# EAGLE board SolarBase731-v00 (EAGLE 5.10)
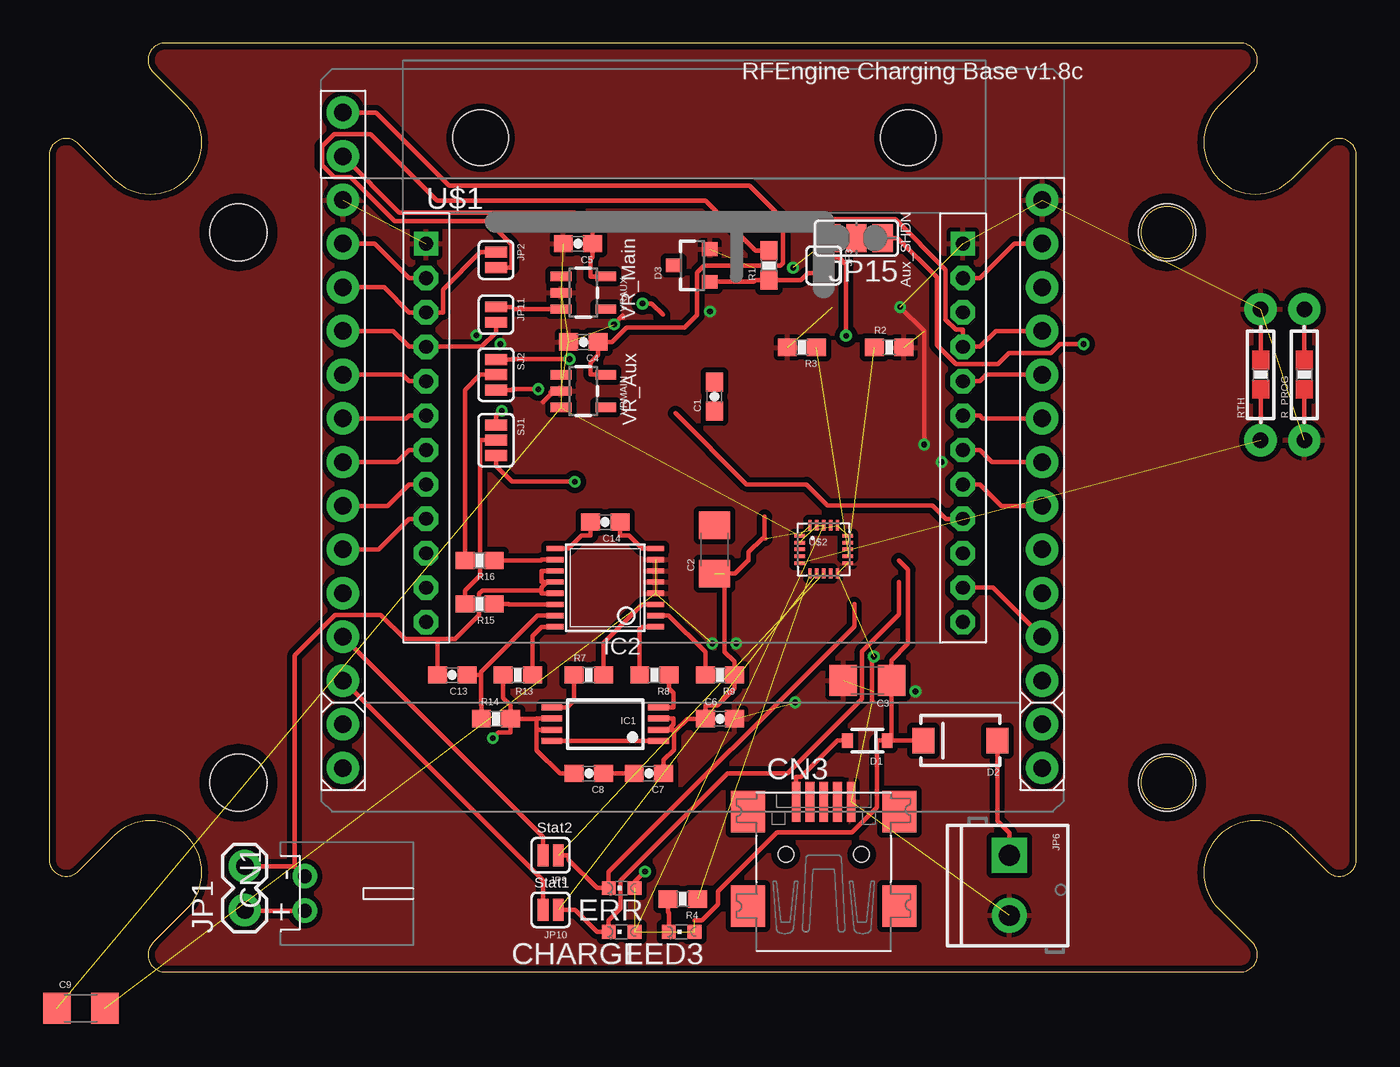
[diagram p0: board, top side]
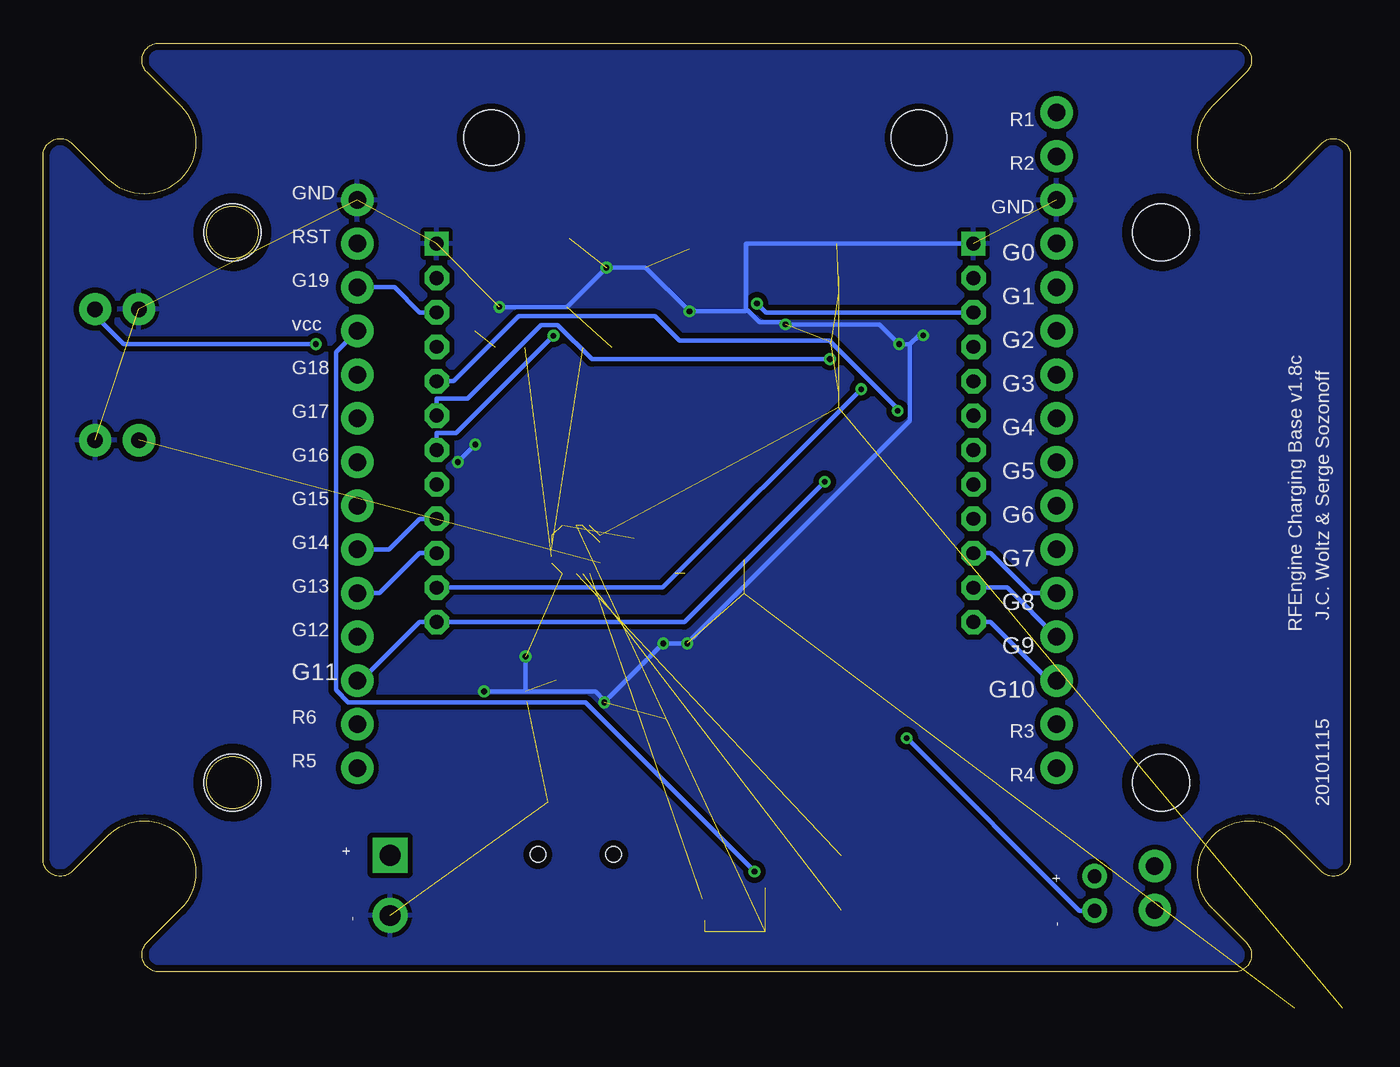
[diagram p1: board, bottom side, seen from below]

Size 76 x 54 mm. Coordinates in mm from the lower left corner, seen from the top.
Outline: 72.24,46.1 arc-180 68,50.34 69.95,52.29 arc135 69.24,54 6.75,54 arc135 6.05,52.29 8,50.34 arc-180 3.76,46.1 1.71,48.15 arc135 0,47.44 0,6.55 arc135 1.71,5.85 3.76,7.9 arc-180 8,3.66 6.05,1.71 arc135 6.75,0 69.24,0 arc135 69.95,1.71 68,3.66 arc-180 72.24,7.9 74.29,5.85 arc135 76,6.55 76,47.44 arc135 74.29,48.15 72.24,46.1
Outline: circle at 64.99,43 radius 1.5
Outline: circle at 64.99,11 radius 1.5
Copper layers (1*16): Top 0.0356mm / dielectric 1.5011mm / Bottom 0.0356mm
Design rules "LaenPCBOrder-JCModified *": minimum track width 10mil, minimum drill 13mil, track to track 10mil, track to pad 6mil, pad to pad 6mil, via to via 6mil, smd to smd 6mil, copper to edge 15mil, drill to drill 6mil, minimum pad ring 12mil, minimum via ring 7mil, stop-mask expansion 4mil, vias tented up to drill 25mil, thermal gap 10mil

## Footprints (pad centres in the part's own frame; a part is rotated, then mirrored left to right if it is on the bottom)
0603-CAP = smd 1.1 x 1: 1 -0.85,0; 2 0.85,0
1206 = smd 1.6 x 1.8: 1 -1.4,0; 2 1.4,0
CHIPLED_0603 = smd 0.8 x 0.8: A 0,-0.75; C 0,0.75
JST-PH-2-THM-RA = drill 0.8 pad 1.422 round: 1 1,0; 2 -1,0
USB-MINIB = smd 0.5 x 2.308: D+ 0,4.064; D- -0.8,4.064; GND 1.6,4.064; ID 0.8,4.064; VBUS -1.6,4.064 | smd 2 x 2.4: GND1 -4.4,-2; GND2 -4.4,3.5; GND3 4.4,3.5; GND4 4.4,-2 | hole 0.9: -2.2,1; 2.2,1
SOD-323 = smd 0.63 x 0.83: 1 -1.15,0; 2 1.15,0
SMA-DIODE = smd 1.27 x 1.47: A -2.15,0; C 2.15,0
SOT23-3 = smd 0.8 x 0.9: 1 -0.95,-1; 2 0.95,-1; 3 0,1.1
TSSOP8-4.4MM = smd 1.2 x 0.35: 1 -3.1,0.975; 2 -3.1,0.325; 3 -3.1,-0.325; 4 -3.1,-0.975; 5 3.1,-0.975; 6 3.1,-0.325; 7 3.1,0.325; 8 3.1,0.975
DS2764 = smd 0.305 x 0.991: CC -2.275,-2.918; DC -0.975,-2.918; IS1 2.275,2.918; IS2 2.275,-2.918; PLS -1.625,-2.918; PS 1.625,-2.918; SCL -0.975,2.918; SDA 1.625,2.918; SNS -0.325,-2.918; SNS1 0.325,-2.918; SNS2 0.975,-2.918; VDD -1.625,2.918; VIN -2.275,2.918; VSS -0.325,2.918; VSS1 0.325,2.918; VSS2 0.975,2.918
1X02 = drill 1.016 pad 1.88 round: 1 0,0; 2 2.54,0
SJ_2S = smd 0.635 x 1.27: 1 -0.45,0; 2 0.45,0
STAND-OFF = hole 3.302: 0,0
SCREWTERMINAL-3.5MM-2 = drill 1.2 pad 2.032 square: 1 0,0 | drill 1.2 pad 2.032 round: 2 3.5,0
SJ_2 = smd 1.168 x 1.6: 1 -1.524,0; 2 0,0; 3 1.524,0
0603-RES = smd 1.1 x 1: 1 -0.85,0; 2 0.85,0
AXIAL-0603 = drill 0.9 pad 1.88 round: P$1 -3.81,0; P$2 3.81,0
SJ_3 = smd 0.635 x 1.27: 1 -0.889,0; 2 0,0; 3 0.889,0
SYNAPSERFENGINE-THM = drill 0.8 square: 1 0,0; 24 31.2,0 | drill 0.8 pad 1.422 octagon: 2 0,-2; 3 0,-4; 4 0,-6; 5 0,-8; 6 0,-10; 7 0,-12; 8 0,-14; 9 0,-16; 10 0,-18; 11 0,-20; 12 0,-22; 13 31.2,-22; 14 31.2,-20; 15 31.2,-18; 16 31.2,-16; 17 31.2,-14; 18 31.2,-12; 19 31.2,-10; 20 31.2,-8; 21 31.2,-6; 22 31.2,-4; 23 31.2,-2 | hole 3.2: 3.17,6.16; 28.03,6.16
QFN20-0.4 = smd 0.6 x 0.2: 1 -1.4,0.8; 2 -1.4,0.4; 3 -1.4,0; 4 -1.4,-0.4; 5 -1.4,-0.8; 11 1.4,-0.8; 12 1.4,-0.4; 13 1.4,0; 14 1.4,0.4; 15 1.4,0.8 | smd 0.2 x 0.6: 6 -0.8,-1.4; 7 -0.4,-1.4; 8 0,-1.4; 9 0.4,-1.4; 10 0.8,-1.4; 16 0.8,1.4; 17 0.4,1.4; 18 0,1.4; 19 -0.4,1.4; 20 -0.8,1.4
SYNSJ-STACK = drill 1.016 pad 1.88 round: G0 0,-7.62; G1 0,-10.16; G2 0,-12.7; G3 0,-15.24; G4 0,-17.78; G5 0,-20.32; G6 0,-22.86; G7 0,-25.4; G8 0,-27.94; G9 0,-30.48; G10 0,-33.02; G11 40.64,-33.02; G12 40.64,-30.48; G13 40.64,-27.94; G14 40.64,-25.4; G15 40.64,-22.86; G16 40.64,-20.32; G17 40.64,-17.78; G18 40.64,-15.24; GND 0,-5.08; GND1 40.64,-5.08; R1 0,0; R2 0,-2.54; R3 0,-35.56; R4 0,-38.1; R5 40.64,-38.1; R6 40.64,-35.56; RESERVED 40.64,-10.16; RESET 40.64,-7.62; VCC 40.64,-12.7
SOT23-5 = smd 0.55 x 1.2: 1 -0.95,-1.3; 2 0,-1.3; 3 0.95,-1.3; 4 0.95,1.3; 5 -0.95,1.3

## Placement (x,y rotation side)
C1  0.47uF  [0603-CAP]  38.68,33.45 90 top
C2  10uF  [1206]  38.68,24.56 90 top
C3  10uF  [1206]  47.57,16.94 180 top
C4  1uF  [0603-CAP]  31.06,36.62 180 top
C5  1uF  [0603-CAP]  30.74,42.34 180 top
C6  1nF  [0603-CAP]  39,14.72 0 top
C7  1nF  [0603-CAP]  34.87,11.54 180 top
C8  1nF  [0603-CAP]  31.38,11.54 180 top
C9  10uF  [1206]  1.85,-2.11 0 top
C13  0.1uF  [0603-CAP]  23.44,17.26 180 top
C14  0.1uF  [0603-CAP]  32.33,26.15 180 top
CHARGE  ORG  [CHIPLED_0603]  33.28,2.33 90 top
CN1  [JST-PH-2-THM-RA]  14.87,4.56 270 top
CN3  [USB-MINIB]  45.03,5.83 0 top
D1  [SOD-323]  47.57,13.45 180 top
D2  [SMA-DIODE]  52.97,13.45 180 top
D3  ADR510  [SOT23-3]  37.41,41.07 90 top
ERR  RED  [CHIPLED_0603]  33.28,4.87 90 top
IC1  IRF7750  [TSSOP8-4.4MM]  32.33,14.4 180 top
IC2  DS2764  [DS2764]  32.33,22.34 90 top
JP1  [1X02]  11.37,3.6 90 top
JP2  [SJ_2S]  25.98,41.39 270 top
JP3  [SJ_2S]  45.03,41.07 270 top
JP4  STAND-OFF  [STAND-OFF]  64.99,43 0 top
JP5  STAND-OFF  [STAND-OFF]  11.01,43 0 top
JP6  [SCREWTERMINAL-3.5MM-2]  55.82,6.78 270 top
JP9  [SJ_2S]  29.15,6.78 180 top
JP10  [SJ_2S]  29.15,3.6 180 top
JP11  [SJ_2S]  25.98,38.21 270 top
JP12  STAND-OFF  [STAND-OFF]  64.99,11 0 top
JP15  [SJ_2]  46.93,42.66 180 top
JP17  STAND-OFF  [STAND-OFF]  11.01,11 0 top
LED3  [CHIPLED_0603]  36.77,2.33 90 top
R1  10K  [0603-RES]  41.85,41.07 90 top
R2  6.19K  [0603-RES]  48.84,36.31 0 top
R3  7.3K  [0603-RES]  43.76,36.31 180 top
R4  1K  [0603-RES]  36.84,4.24 180 top
R7  1K  [0603-RES]  31.38,17.26 0 top
R8  1K  [0603-RES]  35.19,17.26 180 top
R9  150  [0603-RES]  39,17.26 180 top
R13  1K  [0603-RES]  27.25,17.26 180 top
R14  150  [0603-RES]  25.98,14.72 0 top
R15  150  [0603-RES]  25.03,21.38 180 top
R16  150  [0603-RES]  25.03,23.92 180 top
R_PROG  [AXIAL-0603]  72.97,34.72 90 top
RTH  10K @ 25degC  [AXIAL-0603]  70.43,34.72 90 top
SJ1  [SJ_3]  25.98,30.91 270 top
SJ2  [SJ_3]  25.98,34.72 270 top
U$1  SYNAPSEWIRELESS-RFENGINESTD  [SYNAPSERFENGINE-THM]  21.92,42.34 0 top
U$2  MCP73871QFN  [QFN20-0.4]  45.03,24.56 0 top
U$3  SYNAPSE-SJ-STCKINGD30-1600  [SYNSJ-STACK]  17.09,49.96 0 top
VRAUX  MCP1802  [SOT23-5]  31.06,39.48 270 top
VRMAIN  MCP1802  [SOT23-5]  31.06,33.77 270 top

## Library data of the parts
C1-C9 C13 C14 D1 D2 JP1-JP6 JP9-JP12 JP15 JP17 R1 R4 R7-R9 R13-R16 SJ1 SJ2 = SparkFun
CHARGE CN1 CN3 ERR LED3 = adafruit
D3 VRAUX VRMAIN = 0_jc-modified
IC1 IC2 = ssozonoff
R2 R3 R_PROG RTH U$1-U$3 = 0_jc-custom

## Nets
AUX_SHDN: JP11.1 VRAUX.3
CC: IC2.CC R8.2
DC: IC2.DC R7.2
GND: C3.2 C4.2 C5.2 C6.2 C9.2 CN3.GND D3.2 IC2.PS IC2.SNS IC2.SNS1 IC2.SNS2 JP6.2 JP15.3 R2.2 R3.2 R_PROG.P$1 RTH.P$2 U$1.1 U$1.24 U$2.10 U$2.11 U$3.GND U$3.GND1 VRAUX.2 VRMAIN.2
GP0: U$1.2 U$3.G0
GP1: JP2.1 U$1.3 U$3.G1
GP2: JP11.2 U$1.4 U$3.G2
GP3: U$1.5 U$3.G3
GP4: U$1.6 U$3.G4
GP5: U$1.7 U$3.G5
GP6: U$1.8 U$3.G6
GP7: U$1.9 U$3.G7
GP8: U$1.10 U$3.G8
GP9: JP9.2 U$1.11 U$3.G9
GP10: JP10.2 U$1.12 U$3.G10
GP11: SJ1.3 U$1.13 U$3.G11
GP12: SJ2.3 U$1.14 U$3.G12
GP13: U$1.15 U$3.G13
GP14: U$1.16 U$3.G14
GP15: U$1.17 U$3.G15
GP16: JP3.1 U$1.18 U$3.G16
GP17: SJ2.1 U$1.19 U$3.G17
GP18: SJ1.1 U$1.20 U$3.G18
GP19: U$1.22 U$3.RESERVED
I2C_SCL: R15.2 SJ1.2
I2C_SDA: R16.2 SJ2.2
MVOUT: C9.1 U$2.1 U$2.20 VRAUX.1 VRMAIN.1 VRMAIN.3
N$1: IC1.1 IC1.8
N$2: LED3.C R4.2
N$3: D3.1 JP3.2 R1.1
N$4: JP2.2 R1.2
N$5: IC1.4 R8.1
N$6: RTH.P$1 U$2.5
N$7: R3.1 U$2.13
N$8: R2.1 U$2.12
N$10: JP15.1 R_PROG.P$2
N$11: R4.1 U$2.6
N$14: IC1.5 R7.1
N$15: IC2.VIN R13.1
N$16: C14.2 IC2.IS1
N$17: IC2.SCL R15.1
N$18: C13.1 IC2.VDD R14.1
N$19: C7.2 C8.1
N$21: CN3.VBUS D1.2
N$24: C14.1 IC2.IS2
N$25: IC2.SDA R16.1
PAC+: C8.2 CN1.1 IC1.6 IC1.7 JP1.1 R13.2 R14.2
PAC-: C13.2 CN1.2 IC2.VSS IC2.VSS1 IC2.VSS2 JP1.2
PLS: IC2.PLS R9.2
RESET: U$1.23 U$3.RESET
STAT1: CHARGE.C JP10.1 U$2.7
STAT2: ERR.C JP9.1 U$2.8
VBAT+: C2.1 C6.1 C7.1 IC1.2 IC1.3 R9.1 U$2.14 U$2.15 U$2.16
VCC3: C4.1 U$1.21 U$3.R1 U$3.VCC VRMAIN.5
VCC3_AUX: C5.1 U$3.R2 VRAUX.5
VIN: C3.1 CHARGE.A D1.1 D2.C ERR.A LED3.A U$2.2 U$2.18 U$2.19
VINJ: D2.A JP6.1

## Tracks (layer width: path | path; a pad name or v marks a point on that pad's centre or on a via)
AUX_SHDN
  Top 0.254: JP11.1 26.89,38.66 27.02,38.53 VRAUX.3
CC
  Top 0.254: IC2.CC 34.47,20.06 34.34,19.92 R8.2
DC
  Top 0.254: IC2.DC 34.47,21.36 32.23,19.11 R7.2
GND  (via drill 0.33)  (24 unrouted)
  Top 0.254: VRMAIN.2 29.66,33.7 29.15,33.7 29.15,33.57 28.77,33.19 28.7,33.12 | v47.95,18.33 47.82,18.21 47.82,15.79 47.85,15.71 | v32.84,37.64 33.35,38.15 33.38,38.03 | v49.47,38.65 50.87,37.26 v50.87,30.65
  Bottom 0.254: 47.95,16.3 v50.36,16.3 | 47.95,16.3 43.89,16.3 43.38,15.79 v43.38,15.67 v39.95,19.1 v38.55,19.1 25.6,32.05 25.6,36.5 | 47.95,16.3 v47.95,18.33 | 25.6,36.5 v26.23,36.5 27.38,37.64 v32.84,37.64 32.96,37.77 34.36,37.77 35.06,38.46 | 25.6,36.5 25.09,37 v24.84,37 | 35.06,38.46 35.12,38.53 35.12,42.34 U$1.1 | 35.06,38.46 35.12,38.4 v38.43,38.4 40.97,40.94 v43.25,40.94 45.54,38.65 v49.47,38.65 | v50.87,30.65 v51.89,29.64
  pour Top (isolate 0.305): -0.69,0.43 -0.69,53.77 75.51,53.77 75.51,0.43
  pour Bottom (isolate 0.305): 0.58,53.77 0.58,0.43 75.51,0.43 75.51,53.77
GP0
  Top 0.254: U$1.2 20.92,40.34 18.92,42.34 U$3.G0
GP1  (via drill 0.33 pad 0.69)
  Top 0.254: v34.5,38.86 35.03,38.86 35.68,38.21 | U$3.G1 19.46,39.8 20.92,38.34 U$1.3 22.91,38.34 22.91,39.68 25.06,41.84 JP2.1
  Bottom 0.254: v34.5,38.86 33.98,38.34 22.91,38.34 U$1.3
GP2
  Top 0.254: U$3.G2 20,37.26 20.92,36.34 U$1.4 25.15,36.34 25.98,37.16 JP11.2
GP3
  Top 0.254: U$1.5 20.92,34.34 20.54,34.72 U$3.G3
GP4
  Top 0.254: U$1.6 20.92,32.34 20.76,32.18 U$3.G4
GP5
  Top 0.254: U$1.7 20.92,30.34 20.22,29.64 U$3.G5
GP6
  Top 0.254: U$1.8 20.92,28.34 19.68,27.1 U$3.G6
GP7
  Top 0.254: U$1.9 20.92,26.34 19.14,24.56 U$3.G7
GP8
  Bottom 0.254: U$1.10 20.92,24.34 18.6,22.02 U$3.G8
GP9
  Top 0.254: U$3.G9 28.7,7.86 JP9.2
  Bottom 0.254: U$3.G9 19.95,22.34 U$1.11
GP10
  Top 0.254: U$3.G10 28.7,5.32 JP10.2
  Bottom 0.254: U$1.12 20.92,20.34 17.52,16.94 U$3.G10
GP11  (via drill 0.33 pad 0.69)
  Top 0.254: SJ1.3 25.98,29.42 26.91,28.5 v30.56,28.5
  Bottom 0.254: U$3.G11 57.51,16.94 54.11,20.34 U$1.13 38.71,20.34 v30.56,28.5
GP12  (via drill 0.33 pad 0.69)
  Top 0.254: SJ2.3 26.89,33.83 26.94,33.87 v28.44,33.87 | U$3.G12 54.87,22.34 U$1.14
  Bottom 0.254: U$1.14 39.98,22.34 v28.44,33.87
GP13
  Bottom 0.254: U$1.15 54.11,24.34 56.43,22.02 U$3.G13
GP14
  Top 0.254: U$1.16 52.12,26.34 51.34,27.12 45.26,27.12 44.04,28.34 40.55,28.34 36.41,32.48
  Bottom 0.254: U$1.16 54.11,26.34 55.89,24.56 U$3.G14
GP15
  Top 0.254: U$1.17 54.11,28.34 55.35,27.1 U$3.G15
GP16  (via drill 0.33 pad 0.69)
  Top 0.254: v46.33,36.98 46.33,41.13 45.94,41.52 JP3.1 | U$1.18 54.11,30.34 54.81,29.64 U$3.G16
  Bottom 0.254: v46.33,36.98 51.99,31.33 53.12,31.33 U$1.18
GP17  (via drill 0.33 pad 0.69)
  Top 0.254: SJ2.1 26.89,35.61 26.91,35.62 v30.26,35.62 | U$1.19 54.11,32.34 54.27,32.18 U$3.G17
  Bottom 0.254: v30.26,35.62 44.09,35.62 46.08,37.61 47.04,37.61 51.33,33.33 53.12,33.33 U$1.19
GP18  (via drill 0.33 pad 0.69)
  Top 0.254: v26.32,32.62 26.09,32.39 25.98,32.39 SJ1.1 | U$1.20 54.11,34.34 54.49,34.72 U$3.G18
  Bottom 0.254: U$1.20 52.12,34.34 48.34,38.12 40.43,38.12 39,36.69 30.28,36.69 26.32,32.73 v26.32,32.62
GP19
  Bottom 0.254: U$1.22 54.11,38.34 55.57,39.8 U$3.RESERVED
I2C_SCL
  Top 0.254: R15.2 24.18,22.16 25.05,23.03 25.05,30.89 25.06,30.91 SJ1.2
I2C_SDA
  Top 0.254: SJ2.2 25.06,34.72 24.18,33.83 R16.2
MVOUT  (5 unrouted)
N$1
  Top 0.254: IC1.8 IC1.1
N$2
  Top 0.254: R4.2 35.99,3.46 36.02,3.42 LED3.C
N$3
  Top 0.254: D3.1 40.98,40.12 41.07,40.22 R1.1 43.71,40.22 44.12,40.62 JP3.2
N$4
  Top 0.254: JP2.2 26.89,40.93 26.89,42.27 25.52,43.64 20.1,43.64 17.54,46.2 16.57,46.2 15.87,46.9 15.87,47.99 16.57,48.69 18.71,48.69 22.55,44.84 38.15,44.84 41.07,41.92 R1.2
N$5
  Top 0.254: R8.1 36.04,16.48 36.31,16.2 36.31,15.37 IC1.4
N$6  (1 unrouted)
N$7  (1 unrouted)
N$8  (1 unrouted)
N$10  (via drill 0.33)
  Top 0.254: JP15.1 49.32,42.65 51.6,40.38 51.6,36.44 52.7,35.34 55.14,35.34 55.79,35.98 55.82,35.99 58.24,35.99 58.75,36.5 v60.14,36.5
  Bottom 0.254: R_PROG.P$2 72.97,37.77 72.59,37.77 71.32,36.5 v60.14,36.5
N$11  (1 unrouted)
N$14
  Top 0.254: IC1.5 30.11,15.37 30.53,15.79 30.53,16.48 R7.1
N$15
  Top 0.254: IC2.VIN 28.64,20.06 28.1,19.52 R13.1
N$16
  Top 0.254: C14.2 31.48,25.37 30.94,25.37 30.19,24.61 IC2.IS1
N$17
  Top 0.254: R15.1 26.71,21.38 26.73,21.36 IC2.SCL
N$18
  Top 0.254: R14.1 25.13,15.49 25.12,15.51 25.12,17.26 | 25.12,17.26 C13.1 | IC2.VDD 28.41,20.71 25.12,17.42 25.12,17.26
N$19
  Top 0.254: C8.1 C7.2
N$21
  Top 0.254: CN3.VBUS 43.43,11.32 43.7,11.32 45.82,13.44 D1.2
N$24
  Top 0.254: C14.1 33.18,25.37 33.72,25.37 34.47,24.61 IC2.IS2
N$25
  Top 0.254: IC2.SDA 28.64,23.96 28.6,23.92 R16.1
PAC+  (via drill 0.33 pad 0.69)
  Top 0.254: CN1.1 11.42,3.56 JP1.1 | 28.35,14.07 28.35,12.89 29.7,11.54 C8.2 | 28.35,14.07 IC1.7 | 28.35,14.72 28.35,14.07 | R14.2 26.83,13.94 26.14,13.94 v25.79,13.59 | R14.2 26.83,15.49 26.4,15.92 R13.2 | 28.35,14.72 IC1.6 | R14.2 28.34,14.71 28.35,14.72
  Bottom 0.254: CN1.1 15.76,3.56 v25.79,13.59
PAC-
  Top 0.254: 22.59,19.34 20.69,19.34 19.28,20.75 16.62,20.75 14.28,18.41 14.28,6.14 | 28.64,22.18 25.19,22.18 25.01,22 25.01,20.74 23.61,19.34 22.59,19.34 | 22.59,19.34 22.59,18.03 C13.2 | 14.28,6.14 CN1.2 | JP1.2 14.28,6.14 | 28.64,22.18 28.64,22.01 IC2.VSS | 29.02,22.66 28.95,22.66 28.64,22.35 28.64,22.18 | 29.02,22.66 28.64,22.66 28.64,23.31 IC2.VSS2 | 29.02,22.66 IC2.VSS1
PLS
  Top 0.254: IC2.PLS 36.02,20.71 38.15,18.59 R9.2
RESET
  Top 0.254: U$1.23 54.11,40.34 56.11,42.34 U$3.RESET
STAT1  (1 unrouted)
  Top 0.254: 49.4,22.65 49.4,20.77 47.27,18.64 47.27,15.88 42.93,11.54 39.44,11.54 33.21,5.31 33.21,3.69 32.53,3.01 CHARGE.C 31.85,2.33 30.58,3.6 JP10.1
STAT2  (1 unrouted)
  Top 0.254: 46.81,21.38 46.81,20.09 32.53,5.81 ERR.C 31.85,4.87 30.2,6.52 30.2,6.78 JP9.1
VBAT+  (4 unrouted)
  Top 0.254: IC1.3 36.31,14.72 36.31,14.38 36,14.07 35.87,14.07 | 35.87,14.07 36.31,14.07 36.38,14 | 35.87,14.07 IC1.2 | 41.6,25.19 41.46,25.19 40.66,24.4 40.66,23.92 40.62,23.92 39.86,23.16 39.27,23.16 39.27,18.61 39.85,18.03 R9.1 39.85,16.48 38.87,15.49 38.15,15.49 C6.1 37.32,14.71 37.1,14.71 36.38,14 | 41.6,25.19 41.63,25.19 | 41.6,25.19 41.6,26.46 | 36.38,14 36.32,13.93 36.32,12.92 35.72,12.32 C7.1
VCC3  (via drill 0.33 pad 0.69)
  Top 0.254: 42.67,43.75 40.71,45.7 23.26,45.7 19,49.96 U$3.R1 | 42.67,43.75 42.67,41.21 42.51,41.05 38.08,41.05 37.68,40.65 37.68,38.17 36.95,37.44 33.56,37.44 32.74,36.62 C4.1 31.91,35.84 31.48,35.41 31.48,34.71 VRMAIN.5 | 42.67,43.75 49.19,43.75 52.11,40.83 52.11,37.93 52.7,37.33 53.12,37.33 U$1.21 54.11,36.34 55.03,37.26 U$3.VCC | 34.03,5.23 v34.64,5.83
  Bottom 0.254: U$3.VCC 58.97,36.02 58.97,16.38 58.25,15.67 44.47,15.67 v34.64,5.83
VCC3_AUX
  Top 0.254: VRAUX.5 31.48,40.43 31.48,41.45 31.59,41.56 C5.1 31.59,43.12 30.56,44.15 20.36,44.15 U$3.R2
VIN  (6 unrouted)
  Top 0.254: 48.97,13.44 D1.1 48.13,13.44 48.13,9.57 46.66,8.1 42.3,8.1 38.88,4.67 38.88,3.94 37.95,3.01 37.52,3.01 | 48.97,13.44 D2.C | 48.97,13.44 48.97,15.76 C3.1 48.97,18.12 49.94,19.08 49.94,23.38 49.4,23.92
VINJ
  Top 0.254: JP6.1 55.82,8.07 55.12,8.78 D2.A

## Text on the board
tPlace: RFEngine Charging Base v1.8c | VR_Main | Aux_SHDN | VR_Aux | Stat2 | Stat1
bPlace: R1 | R2 | GND | GND | G0 | RST | G1 | G19 | G2 | vcc | G3 | G18 | G4 | G17 | G5 | G16 | G6 | G15 | G7 | G14 | G8 | G13 | J.C. Woltz & Serge Sozonoff | RFEngine Charging Base v1.8c | G9 | G12 | G10 | G11 | R3 | R6 | R4 | R5 | 20101115 | + | + | - | -